# Altium PCB 0SC_praca_mgr.PcbDoc
Units mil, origin at the board's own origin, x right, y up, seen from the top; angles counter-clockwise.
Board outline 877.03 x 1269.03 mil, 2 copper layers (Top Layer, Bottom Layer); 22 components, 18 nets, 105 pads, 30 vias.
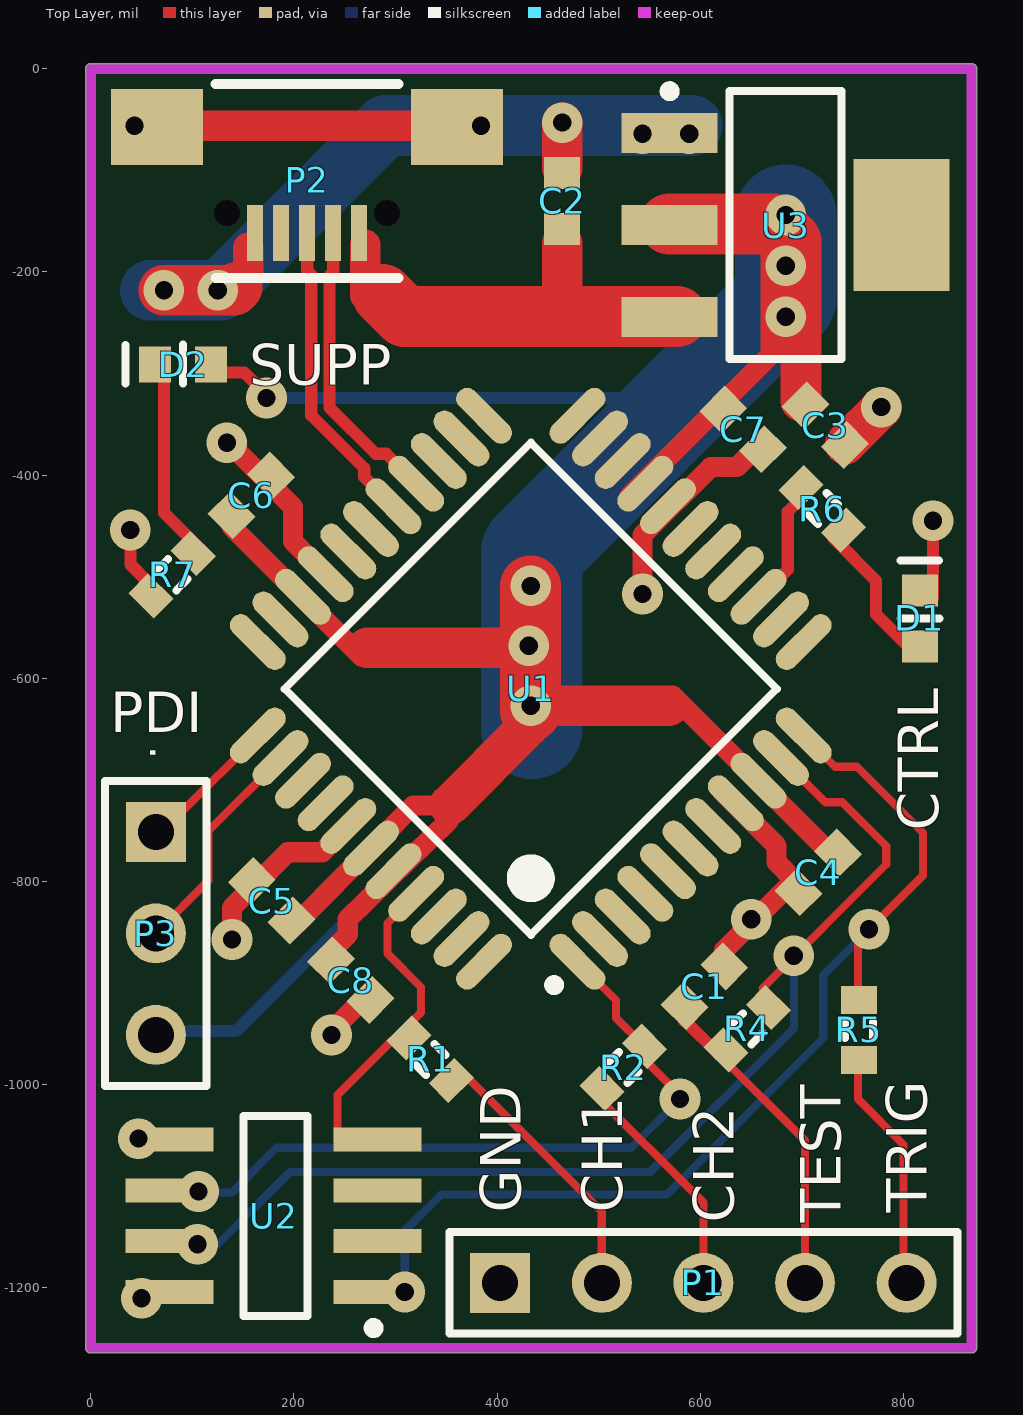
[diagram p0: Top Layer view]
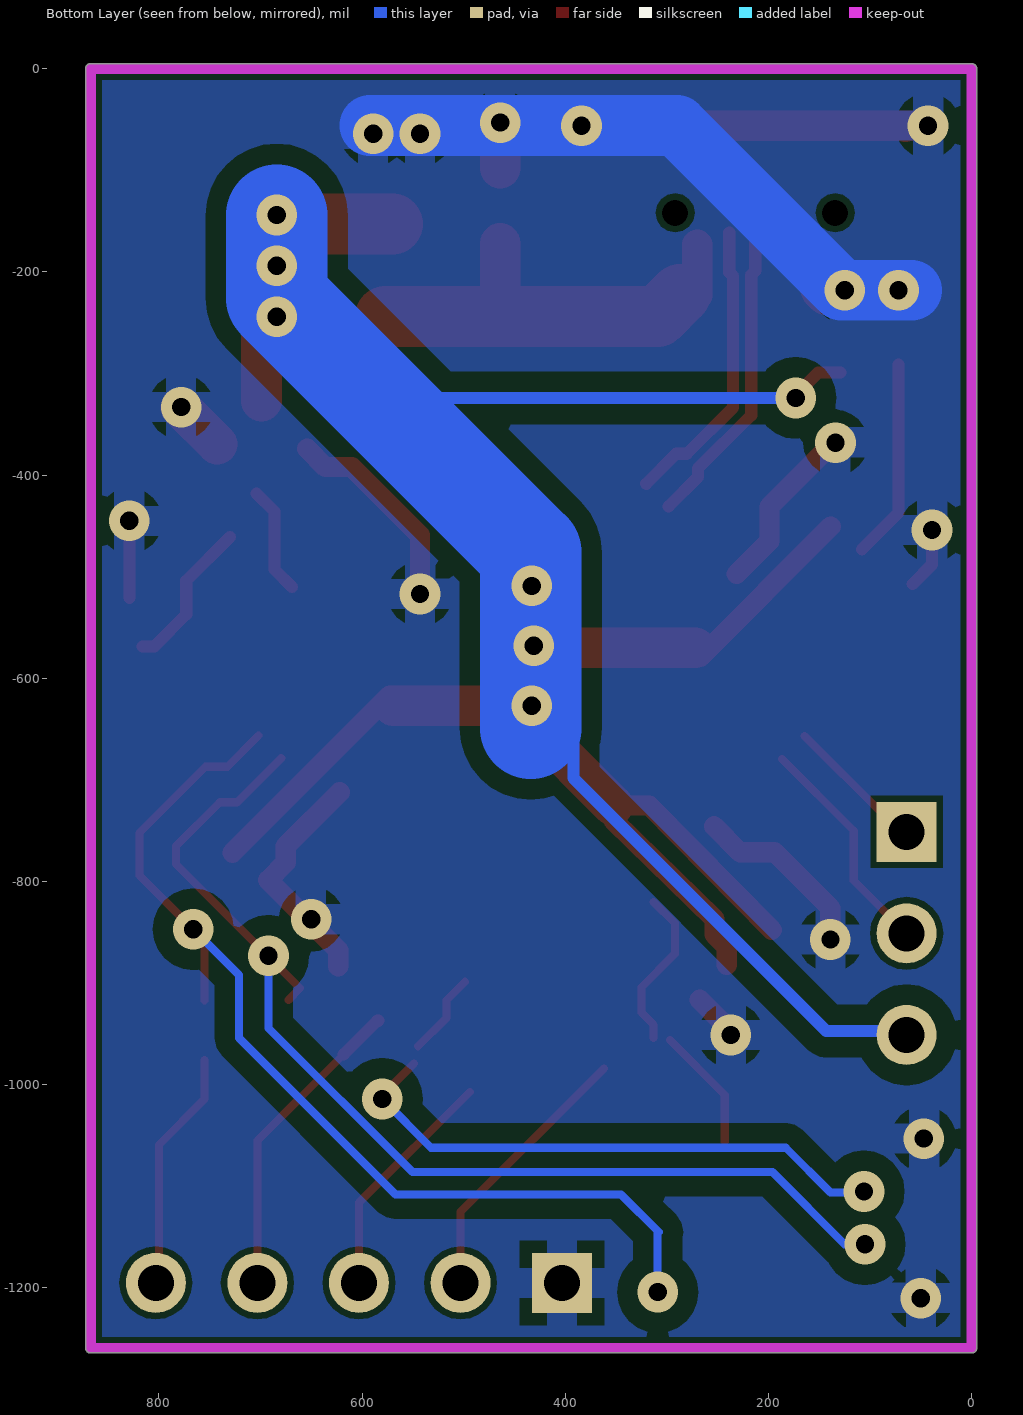
[diagram p1: Bottom Layer view, seen from below]

## Layer stack, top to bottom
Top Solder: solder mask 0.4, Solder Resist, Dk 3.5
Top Layer: signal copper 1.4
Dielectric2: dielectric 12.6, FR-4, Dk 4.8
Bottom Layer: signal copper 1.4
Bottom Solder: solder mask 0.4, Solder Resist, Dk 3.5

## Board outline
0,-1264.02 cw(c0,-1259) -5.01,-1259 -5.01,0 cw(c0,0) 0,5.01 867,5.01 cw(c867,0) 872.02,0 872.02,-1259 cw(c867,-1259) 867,-1264.02

## Design rules (kind name [scope] priority, off if disabled: settings)
Clearance Clearance_8 [InNamedPolygon('Bottom Layer-GND') vs InNet('TRIG')] p1: gap=20
Clearance Clearance_6 [InNamedPolygon('Bottom Layer-GND') vs InNet('TEST_X')] p2: gap=20
Clearance Clearance_5 [InNamedPolygon('Bottom Layer-GND') vs InNet('CH2')] p3: gap=20
Clearance Clearance_4 [InNamedPolygon('Bottom Layer-GND') vs InNet('VCC_3V3')] p4: gap=20
Clearance Clearance_3 [InNamedPolygon('Bottom Layer-No Net')] p5: gap=100
Clearance Clearance_2 [InNamedPolygon('GND_L02_P014')] p6: gap=15
Clearance [All] p7: gap=6
DiffPairsRouting [All] p1: maxlimit=20 minlimit=6 mostfreqgap=6 toplayer_minwidth=5 toplayer_maxwidth=30 toplayer_prefwidth=12 bottomlayer_minwidth=5 bottomlayer_maxwidth=30 bottomlayer_prefwidth=12 maxuncoupledlength=500
HoleSize [All] p1: absolutevalues=TRUE maxlimit=500 minlimit=1 maxpercent=80.000 minpercent=20.000
MinimumSolderMaskSliver [All] p1: minsoldermaskwidth=1
PlaneConnect [All] p1: planeconnectstyle=Relief reliefexpansion=20 reliefentries=4 reliefconductorwidth=20 reliefairgap=10
PolygonConnect [All] p1: connectstyle=Relief reliefconductorwidth=30 reliefentries=4 polygonreliefangle="90 Angle" airgapwidth=12
RoomDefinition 0SC_praca_mgr [InComponentClass('0SC_praca_mgr')] p1: confinementstyle=ConfineIn formatcopy=TRUE lockcomponents=FALSE outline 2125,-1309 -315,-1309 -315,239 2125,239
RoutingVias [All] p1: holewidth=12 width=28 viastyle="Through Hole" minholewidth=12 minwidth=28 maxholewidth=500 maxwidth=2000
SilkToSilkClearance [All] p1: silktosilkclearance=1
SilkToSolderMaskClearance [IsPad] p1: minsilkscreentomaskgap=1 clearancetoexposedcopper=TRUE
SolderMaskExpansion [All] p1: expansion=4
UnpouredPolygon [All] p1: allowunpoured=TRUE allowshelved=TRUE
Width [All] p1: maxlimit=200 minlimit=6 preferedwidth=8
23 further rules are at their usual default settings.

## Classes and differential pairs
differential pair USB: +USB_P -USB_N

## Components (designator, comment, footprint, x,y, rotation, side; value= is the part's Value field where it differs from the comment)
C1 "Cap Semi" 1608[0603] 604,-903 r225 top
C2 "Cap Semi" 1608[0603] 464,-130 r270 top locked
C3 "Cap Semi" 1608[0603] 723,-351 r135 top
C4 "Cap Semi" 1608[0603] 716,-791 r45 top locked
C5 "Cap Semi" 1608[0603] 178,-819 r315 top locked
C6 "Cap Semi" 1608[0603] 158,-420 r225 top
C7 "Cap Semi" 1608[0603] 642,-355 r135 top locked
C8 "Cap Semi" 1608[0603] 256,-897 r135 top locked
D1 "LED1" 0603_led 816,-541 r90 top
D2 "LED2" 0603_led 91,-291 r180 top locked
P1 "Header 5" HDR1X5 403,-1195 r0 top locked
P2 "USB micro" KEY-940 213,-189 r180 top locked
P3 "Header 3" HDR1X3 64,-751 r270 top locked
R1 "Res3" J1-0603 334,-975 r315 top locked
R2 "Res3" J1-0603 524,-983 r225 top
R4 "Res3" J1-0603 646,-945 r225 top
R5 "Res3" J1-0603 756,-946 r270 top
R6 "Res3" J1-0603 720,-433 r315 top locked
R7 "Res3" J1-0603 80,-498 r225 top locked
U1 "ATxmega32A4U-AU" 44A_N 433.07,-610.24 r135 top locked
U2 "SRDA3.3-4" SOIC8 180,-1129 r180 top locked
U3 "LM1117MP-3.3" MP04A_N 684,-154 r0 top locked

## Footprints (in the part's own frame and the unit in brackets; to place one, negate y for a bottom-side part, rotate by r counter-clockwise, add the part's x,y. Pads: shape width x height; smd on the part's side, far side on the other; paste and mask are expansions set on the pad)
44A_N [mm] "Thin QFP, 44-Leads, Body 10x10mm, Pitch 0.8mm, IPC Medium Density"
  oval 1.75x0.55 smd: 1(-5.65,4) 2(-5.65,3.2) 3(-5.65,2.4) 4(-5.65,1.6) 5(-5.65,0.8) 6(-5.65,0) 7(-5.65,-0.8) 8(-5.65,-1.6) 9(-5.65,-2.4) 10(-5.65,-3.2) 11(-5.65,-4) 23(5.65,-4) 24(5.65,-3.2) 25(5.65,-2.4) 26(5.65,-1.6) 27(5.65,-0.8) 28(5.65,0) 29(5.65,0.8) 30(5.65,1.6) 31(5.65,2.4) 32(5.65,3.2) 33(5.65,4)
  oval 0.55x1.75 smd: 12(-4,-5.65) 13(-3.2,-5.65) 14(-2.4,-5.65) 15(-1.6,-5.65) 16(-0.8,-5.65) 17(0,-5.65) 18(0.8,-5.65) 19(1.6,-5.65) 20(2.4,-5.65) 21(3.2,-5.65) 22(4,-5.65) 34(4,5.65) 35(3.2,5.65) 36(2.4,5.65) 37(1.6,5.65) 38(0.8,5.65) 39(0,5.65) 40(-0.8,5.65) 41(-1.6,5.65) 42(-2.4,5.65) 43(-3.2,5.65) 44(-4,5.65)
  silkscreen extent -5.77,-4.35 4.35,4.95, body extent -5,-5 5,5, height 1.2
0603_led [mm]
  rect 0.8x0.9 smd: 1(-0.7,0) 2(0.7,0)
  silkscreen extent 0,-0.5 1.45,0.48, body extent -0.87,-0.48 0.87,0.48, height 1.3
1608[0603] [mm] "Chip Capacitor, Body 1.6x0.8mm, IPC High Density"
  rect 0.8x0.9 smd: 1(-0.7,0) 2(0.7,0)
  body extent -0.87,-0.47 0.87,0.47, height 1.3
HDR1X3 [mm] "Connector; Header; 3 Position"
  rect 1.5x1.5 hole 0.9: 1(0,0)
  round 1.5 hole 0.9: 2(2.54,0) 3(5.08,0)
  silkscreen extent -1.27,-1.27 6.35,1.27
HDR1X5 [mm] "Connector; Header; 5 Position"
  rect 1.5x1.5 hole 0.9: 1(0,0)
  round 1.5 hole 0.9: 2(2.54,0) 3(5.08,0) 4(7.62,0) 5(10.16,0)
  silkscreen extent -1.27,-1.27 11.43,1.27
J1-0603 [mm] "Chip Resistor, Body 1.6x0.8mm, IPC High Density"
  rect 0.7x0.9 smd: 1(-0.75,0) 2(0.75,0)
  silkscreen extent -0.2,-0.35 0.2,0.35, body extent -0.85,-0.47 0.85,0.47, height 0.9
KEY-940 [mm] "USB_micro"
  rect 0.4x1.4 smd: 1(-1.3,-0.7) 2(-0.65,-0.7) 3(0,-0.7) 4(0.65,-0.7) 5(1.3,-0.7)
  rect 2.3x1.9 smd: 6(-3.75,-3.35) 6(3.75,-3.35)
  round 0 hole 0.65 unplated: ""(-2,-1.2) ""(2,-1.2)
  silkscreen extent -2.29,-4.42 2.29,0.43, body extent -3.95,-6.02 3.95,-0.5, height 3
MP04A_N [mm] "SOT223, 4-Leads, Body 6.5x3.5mm, Pitch 2.3mm, Lead Span 7mm, IPC Medium Density"
  rect 2.4x1 smd: 1(-2.9,2.3) 2(-2.9,0) 3(-2.9,-2.3)
  rect 2.4x3.3 smd: 4(2.9,0)
  silkscreen extent -3.02,-3.35 1.4,3.47, body extent -1.85,-3.35 1.85,3.35, height 1.8
SOIC8 [mm]
  rect 2.2x0.6 smd: 1(-2.6,1.905) 2(-2.6,0.635) 3(-2.6,-0.635) 4(-2.6,-1.905) 5(2.6,-1.905) 6(2.6,-0.635) 7(2.6,0.635) 8(2.6,1.905)
  silkscreen extent -2.63,-2.5 0.75,2.93, body extent -2,-2.5 2,2.5, height 1.73

## Part data
C1 C2 C3 C4 C5 C6 C7 C8: "Capacitor (Semiconductor SIM Model)"
D1 D2: library part Led
P1: "Header, 5-Pin"
P3: "Header, 3-Pin"
R1 R2 R4 R5 R6 R7: "Resistor"
U1: "8/16-bit AVR XMEGA A4U Microcontroller, 1.6-3.6V, 32MHz, 32K + 4KB Flash, 1K EEPROM, 4K SRAM, 44-pin TQFP, Industrial Grade (-40°C to 85°C)"
U3: "800mA Low-Dropout Linear Regulator"

## Via types
v1: diameter 40, hole 18, Top Layer to Bottom Layer, tented both sides, 30 vias

## Nets (pads, with @x,y where several pads share a name; then routed paths per layer and width w, separated by ;. In a path a pad name is that pad's centre, name@x,y a point inside that pad or via, vN(x,y) a via of type N, cw(c..) or ccw(c..) an arc to the next point about the centre after c; other vN are vias at no path point)
CH1: R1.1 U1.41 U2.4 | length 283.8
  Top Layer w8: U2.4@243,-1056 243,-1010 R1.1@297,-956 ; U1.41@313,-820 292,-841 292,-871 325,-904 325,-929 313.12,-940.88 R1.1
CH2: R2.1 U1.1 U2.6 | length 641.5
  Top Layer w8: U1.1@498.69,-898.57 517,-916.88 517,-934.24 R2.1 ; R2.1@549,-979 v1@582,-1012
  Bottom Layer w8: v1@106,-1106 139,-1106 183,-1062 532,-1062 v1(580,-1014)
  other v1: 106,-1105
CTR_LED: R6.1 U1.14 | length 106.5
  Top Layer w12: U1.14@669,-510 686,-493 686,-436 R6.1@704,-418
GND: C1.1 C2.1 C3.1 C4.1 C5.1 C6.1 C7.1 C8.1 D1.2 P1.1 P2.5 P2.6 R7.2 U1.8 U1.18 U1.30 U1.38 U2.5 U2.8 U3.1 | length 2139.7
  Top Layer w12: v1(39,-454) 39,-488 R7.2@58,-507 ; D1.2@829,-521 v1(829,-445)
  Top Layer w20: v1(134,-368) 136,-368 199,-431 199,-465 U1.30@231.24,-497.24 ; v1(139,-857) 139,-826 194,-771 228,-771 U1.38@253.51,-745.49 ; v1(237,-951) 237,-947 C8.1@267.51,-916.49 ; v1@543,-513 543,-459 610,-392 636,-392 C7.1@654,-374 ; U1.8@622,-712 675,-765 675,-781 692.5,-798.5 623.49,-867.51 C1.1
  Top Layer w30: P2.6@65.36,-57.11 64.25,-56 v1(43,-56) v1(384,-56) ; v1@144,-215 155,-204 P2.5@155,-176
  Top Layer w40: C2.1@464,-98 v1(464,-53) ; C3.1@742.49,-369.51 v1@778.5,-333.5
  Top Layer w50: v1(72,-218) 141,-218 v1@144,-215
  Bottom Layer w60: v1@59,-218 128,-218 290,-56 v1@592,-56
  other v1: 50,-1210 47,-1053 650,-837 543,-517 778,-333 125,-218 543,-64 589,-64
NetD1_1: D1.1 R6.2 | length 149.9
  Top Layer w12: R6.2@730,-461 773,-504 773,-537 804.56,-568.56 D1.1
NetD2_2: D2.2 R7.1 | length 196.9
  Top Layer w12: D2.2@72,-291 72,-437 R7.1@108,-473
NetP1_2: P1.2 R1.2 | length 269.4
  Top Layer w8: R1.2@362,-984 503,-1125 P1.2
NetP1_3: P1.3 R2.2 | length 233.1
  Top Layer w8: R2.2@494,-1007 603,-1116 P1.3
NetP1_5: P1.5 R5.2 | length 229.1
  Top Layer w8: R5.2@755,-975.53 755,-1014 800,-1059 P1.5@800,-1186
PDI_DATA: P3.1 U1.34 | length 108.1
  Top Layer w8: P3.1@88,-733 U1.34@164.43,-656.57
R\S\T\/PDI_CLK: P3.2 U1.35 | length 222.5
  Top Layer w8: P3.2 116,-799 116,-750 U1.35@186.7,-679.3
TEST: C1.2 P1.4 R4.2 | length 307.9
  Top Layer w8: R4.2@618,-970 703,-1055 P1.4
  Top Layer w12: C1.2@584,-937 585,-937 R4.2@618,-970
TEST_X: R4.1 U1.10 U2.7 | length 1092.7
  Top Layer w8: R4.1@672.5,-916.5 661,-905 783,-783 783,-765 740,-722 723,-722 U1.10
  Bottom Layer w8: v1(105,-1157) 125,-1157 196,-1086 550.43,-1086 692,-944.43 v1(692,-873)
TRIG: R5.1 U1.11 U2.1 | length 1020.7
  Top Layer w8: U1.11 732.55,-687 754,-687 819,-752 819,-794 v1(766,-847) 755,-858 R5.1@755,-917
  Bottom Layer w8: v1@309,-1199 309,-1146 308,-1145 345,-1108 567,-1108 721,-954 721,-892 v1(766,-847)
  other v1: 309,-1204
USB_N: P2.2 U1.26 | length 289.9
  Top Layer w12: P2.2 238.59,-200.41 235,-204 235,-333.54 280.46,-379 290.92,-379 U1.26
USB_P: P2.3 U1.27 | length 304.5
  Top Layer w12: P2.3 213,-199 217,-203 217,-341 269.19,-393.19 269.19,-401.81 U1.27
VCC_3V3: C3.2 C4.2 C5.2 C6.2 C7.2 C8.2 D2.1 P3.3 U1.9 U1.19 U1.31 U1.39 U1.40 U3.2 | length 3363.6
  Top Layer w12: D2.1@129,-299 151,-299 173,-321 v1(173,-324)
  Top Layer w20: C6.2@138.51,-450.51 267,-579 ; C5.2@196.61,-847.61 317.39,-725.12 352.88,-724.88 ; C8.2@241,-882 241,-864 252.87,-852.13 253.06,-836.86 352.55,-739.82 ; U1.19@530,-421 669,-282 v1@669,-256 ; 573,-617 C4.2@727.51,-771.51
  Top Layer w40: 272,-570 v1@422,-570 ; 352.88,-724.88 353,-725 431,-647 v1@431,-634 ; v1(433,-627) 569,-627 ; C3.2@699,-327 v1@699,-236
  Top Layer w60: v1@433,-632 v1(433,-509) ; U3.2@569.83,-153 672,-153 689,-170 v1@689,-250
  Bottom Layer w12: P3.3@77,-938 86,-947 143,-947 392,-698 392,-654 ; v1(173,-324) 557,-324
  Bottom Layer w100: 434,-649 434,-476 684,-226 v1(684,-144)
  other v1: 431,-568 684,-244 684,-194
VCC_5V_USB: C2.2 P2.1 U3.3 | length 406.1
  Top Layer w30: 270,-223 P2.1@270,-173
  Top Layer w40: 464,-229 C2.2@464,-172
  Top Layer w60: 287,-222 309,-244 U3.3@577,-244
pads on no net: P2. P2.4 U1.2 U1.3 U1.4 U1.5 U1.6 U1.7 U1.12 U1.13 U1.15 U1.16 U1.17 U1.20 U1.21 U1.22 U1.23 U1.24 U1.25 U1.28 U1.29 U1.32 U1.33 U1.36 U1.37 U1.42 U1.43 U1.44 U2.2 U2.3 U3.4

## Polygon pours and split planes (outlines as drawn)
GND on Bottom Layer "Bottom Layer-GND" (solid, pour order 10): 0,0 867,0 867,-1259 0,-1259

## Keep-outs
Keep-Out Layer:
  lines w10: 0,-1259 0,0 867,0 867,-1259 0,-1259

## Silkscreen, mask and mechanical layers (free items; w line width, h text height)
Top Overlay:
  text "SUPP" at 156,-311 h40
  text "PDI" at 19,-653 h40
  text "." at 64,-680 h31.5 r90
  text "CTRL" at 834,-750 h40 r90
  text "GND" at 423,-1126 h40 r90
  text "CH1" at 523,-1126 h40 r90
  text "TRIG" at 823,-1126 h40 r90
  text "CH2" at 633,-1136 h40 r90
  text "TEST" at 738,-1136 h40 r90